# EAGLE board H-Bridge (EAGLE 7.6.0)
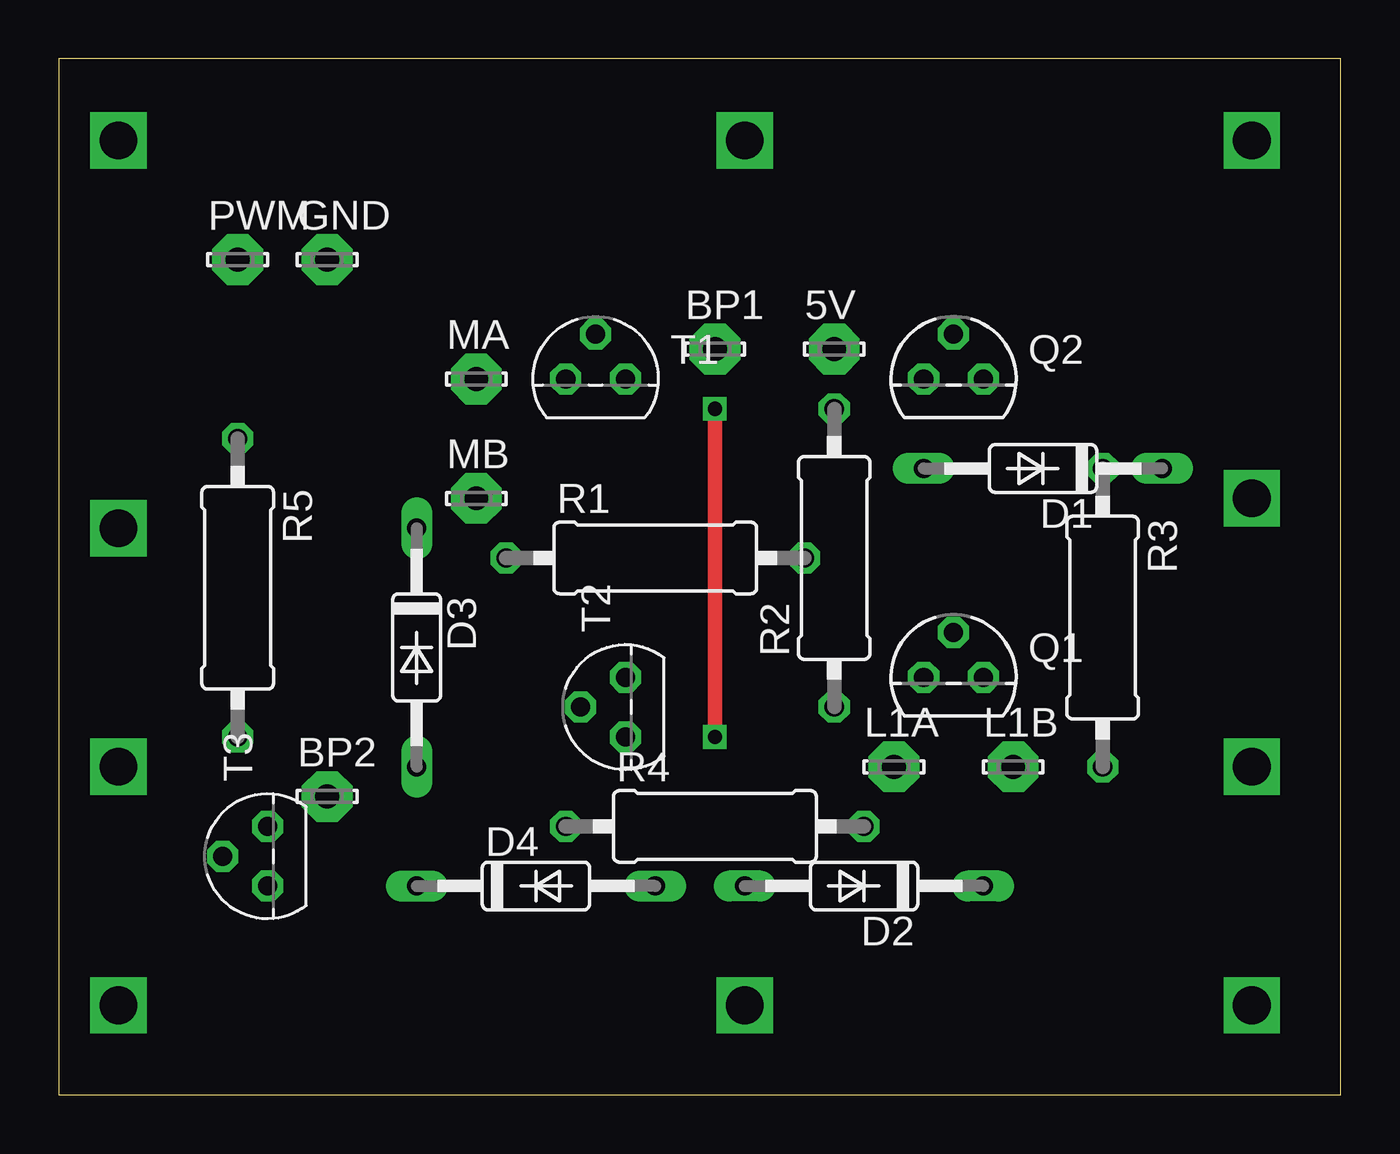
[diagram p0: board, top side]
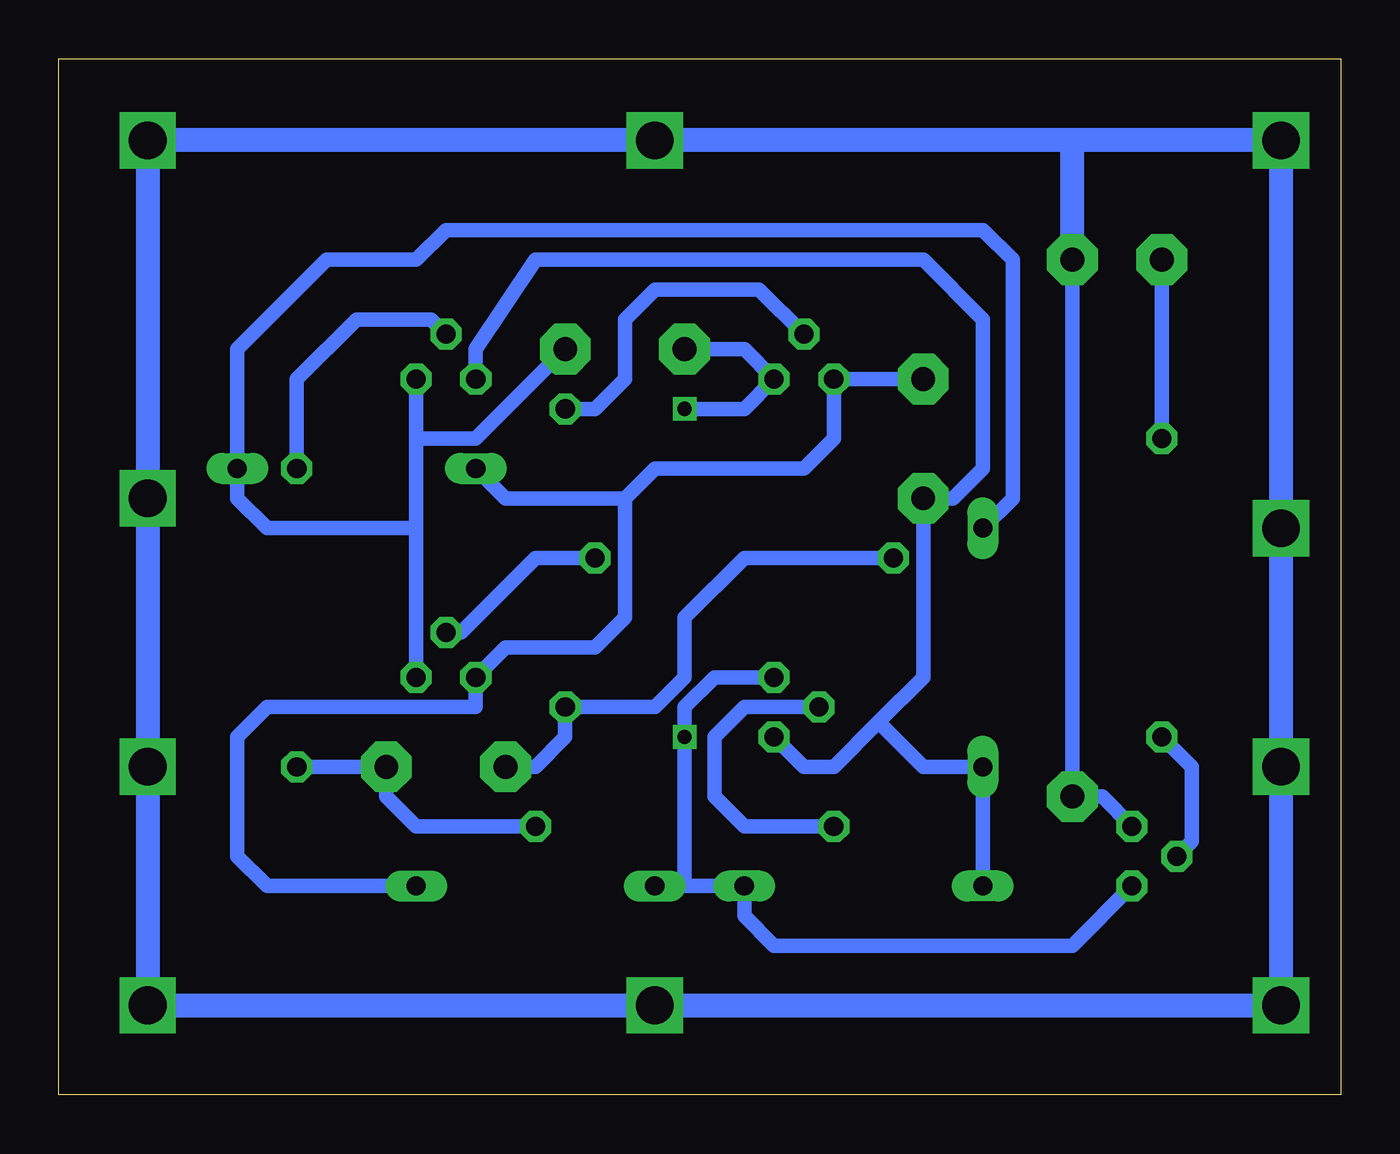
[diagram p1: board, bottom side, seen from below]

Size 54.59 x 44.12 mm. Coordinates in mm from the lower left corner, seen from the top.
Outline: 0,0 54.59,0 54.59,44.12 0,44.12 0,0
Copper layers (1*16): Top 0.035mm / dielectric 1.5mm / Bottom 0.035mm
Design rules "default": minimum track width 10mil, minimum drill 24mil, track to track 8mil, track to pad 8mil, pad to pad 8mil, via to via 8mil, smd to smd 8mil, copper to edge 40mil, drill to drill 8mil, minimum pad ring 10mil, minimum via ring 8mil, stop-mask expansion 4mil, vias tented up to drill 0mil, thermal gap 10mil

## Footprints (pad centres in the part's own frame; a part is rotated, then mirrored left to right if it is on the bottom)
LSP10 = drill 1.016 pad 2.159 octagon: MP 0,0
DO35-10 = drill 0.813 long: A 5.08,0; C -5.08,0
TO92 = drill 0.813 octagon: 1 1.27,0; 2 0,1.905; 3 -1.27,0
0309/12 = drill 0.813 octagon: 1 -6.35,0; 2 6.35,0

## Placement (x,y rotation side)
5V  LSP10  [LSP10]  33.02,31.75 0 top
BP1  LSP10  [LSP10]  27.94,31.75 0 top
BP2  LSP10  [LSP10]  11.43,12.7 0 top
D1  1N4148DO35-10  [DO35-10]  41.91,26.67 180 top
D2  1N4148DO35-10  [DO35-10]  34.29,8.89 180 top
D3  1N4148DO35-10  [DO35-10]  15.24,19.05 270 top
D4  1N4148DO35-10  [DO35-10]  20.32,8.89 0 top
GND  LSP10  [LSP10]  11.43,35.56 0 top
L1A  LSP10  [LSP10]  35.56,13.97 0 top
L1B  LSP10  [LSP10]  40.64,13.97 0 top
MA  LSP10  [LSP10]  17.78,30.48 0 top
MB  LSP10  [LSP10]  17.78,25.4 0 top
PWM  LSP10  [LSP10]  7.62,35.56 0 top
Q1  BC557  [TO92]  38.1,17.78 0 top
Q2  BC557  [TO92]  38.1,30.48 0 top
R1  10k  [0309/12]  25.4,22.86 0 top
R2  10k  [0309/12]  33.02,22.86 90 top
R3  10k  [0309/12]  44.45,20.32 270 top
R4  10k  [0309/12]  27.94,11.43 0 top
R5  1k2  [0309/12]  7.62,21.59 270 top
T1  BC547  [TO92]  22.86,30.48 0 top
T2  BC547  [TO92]  24.13,16.51 90 top
T3  BC547  [TO92]  8.89,10.16 90 top

## Library data of the parts
5V BP1 BP2 GND L1A L1B MA MB PWM = solpad
D1-D4 = diode
Q1 Q2 = transistor-pnp
R1-R5 = rcl
T1-T3 = transistor-neu-to92

## Nets
N$1: L1A.MP R1.1 R2.1
N$2: Q1.2 R1.2
N$3: R2.2 T1.2
N$4: D1.A D2.C MA.MP Q1.3 T1.3
N$5: D3.A D4.C MB.MP Q2.3 T2.3
N$6: Q2.2 R3.1
N$7: R4.1 T2.2
N$8: L1B.MP R3.2 R4.2
N$9: BP1.MP D2.A D4.A T1.1 T2.1 T3.3
N$10: 5V.MP D1.C D3.C Q1.1 Q2.1
N$11: R5.2 T3.2
N$12: PWM.MP R5.1
N$13: BP2.MP GND.MP T3.1

## Tracks (layer width: path | path; a pad name or v marks a point on that pad's centre or on a via)
N$1
  Bottom 0.61: L1A.MP 34.29,13.97 33.02,15.24 R2.1 29.21,16.51 27.94,17.78 27.94,20.32 25.4,22.86 R1.1
N$2
  Bottom 0.61: R1.2 34.29,22.86 37.47,19.69 Q1.2
N$3
  Bottom 0.61: T1.2 24.76,34.29 29.21,34.29 30.48,33.02 30.48,30.48 31.75,29.21 R2.2
N$4
  Bottom 0.61: MA.MP T1.3 21.59,27.94 22.86,26.67 29.21,26.67 30.48,25.4 | 30.48,25.4 30.48,20.32 31.75,19.05 35.56,19.05 Q1.3 36.83,16.51 45.72,16.51 46.99,15.24 46.99,10.16 45.72,8.89 D2.C | D1.A 35.56,25.4 30.48,25.4
N$5
  Bottom 0.61: T2.3 22.86,13.97 21.59,13.97 19.68,15.88 | Q2.3 36.83,31.75 34.29,35.56 17.78,35.56 15.24,33.02 15.24,26.67 16.51,25.4 MB.MP 17.78,17.78 19.68,15.88 | 19.68,15.88 17.78,13.97 D3.A D4.C
N$6
  Bottom 0.61: Q2.2 38.73,33.02 41.91,33.02 44.45,30.48 R3.1
N$7
  Bottom 0.61: T2.2 25.4,16.51 26.67,15.24 26.67,12.7 25.4,11.43 R4.1
N$8
  Bottom 0.61: R4.2 39.37,11.43 40.64,12.7 L1B.MP R3.2
N$9  (via drill 0.6)
  Top 0.61: v27.94,29.21 v27.94,15.24
  Bottom 0.61: BP1.MP 25.4,31.75 T1.1 25.4,29.21 v27.94,29.21 | T2.1 26.67,17.78 27.94,16.51 v27.94,15.24 27.94,8.89 | 27.94,8.89 D4.A 25.4,7.62 24.13,6.35 11.43,6.35 T3.3 | 27.94,8.89 D2.A
N$10
  Bottom 0.61: Q2.1 39.37,27.94 | 39.37,27.94 39.37,24.13 | 39.37,24.13 Q1.1 | 5V.MP 36.83,27.94 39.37,27.94 | 39.37,24.13 45.72,24.13 46.99,25.4 D1.C 46.99,31.75 43.18,35.56 39.37,35.56 38.1,36.83 15.24,36.83 13.97,35.56 13.97,25.4 D3.C
N$11
  Bottom 0.61: T3.2 6.35,10.8 6.35,13.97 R5.2
N$12
  Bottom 0.61: PWM.MP R5.1
N$13  (via drill 1.6)
  Bottom 0.61: T3.1 10.16,12.7 BP2.MP GND.MP
  Bottom 1.016: 11.43,40.64 v29.21,40.64 v50.8,40.64 v50.8,25.4 v50.8,13.97 v50.8,3.81 v29.21,3.81 v2.54,3.81 v2.54,13.97 v2.54,24.13 v2.54,40.64 11.43,40.64 | GND.MP 11.43,40.64